# EAGLE board Transceivers_Ver2 (EAGLE 7.1.0)
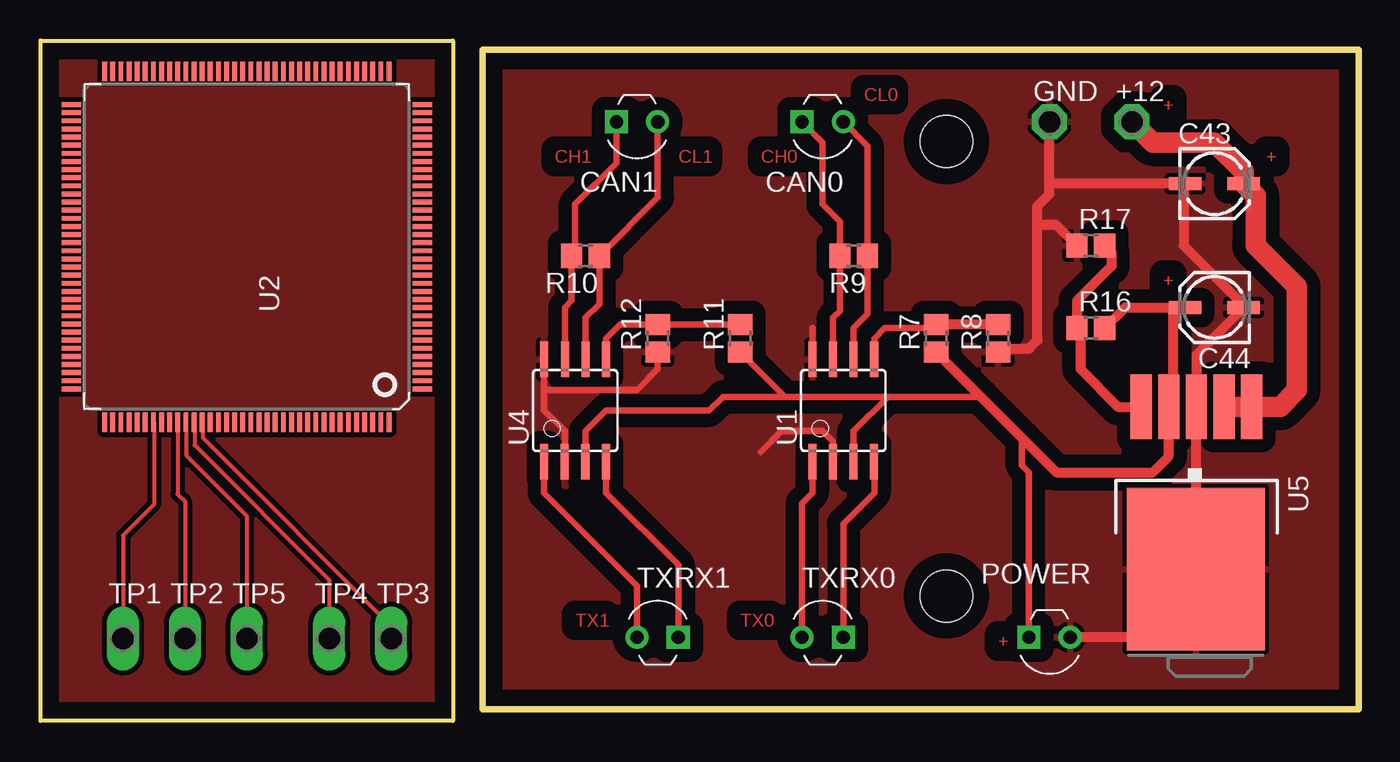
[diagram p0: board, top side]

Size 81.18 x 41.91 mm. Coordinates in mm from the lower left corner, seen from the top.
Outline: 27.2,0.71 27.2,41.35 81.18,41.35 81.18,0.71 27.2,0.71
Outline: 0,41.91 25.4,41.91 25.4,0 0,0 0,41.91
Copper layers (1*16): Top 0.035mm / dielectric 1.5mm / Bottom 0.035mm
Design rules "default": minimum track width 10mil, minimum drill 24mil, track to track 8mil, track to pad 8mil, pad to pad 8mil, via to via 8mil, smd to smd 8mil, copper to edge 40mil, drill to drill 8mil, minimum pad ring 10mil, minimum via ring 8mil, stop-mask expansion 4mil, vias tented up to drill 0mil, thermal gap 10mil
Net classes: 0 default: width 0.203 mm, drill 0.406 mm, clearance 0.203 mm; 3 usbvcc: width 0.203 mm, drill 0.406 mm, clearance 0.203 mm; 4 USBpair: width 0.254 mm, drill 0.406 mm, clearance 0.61 mm
Holes 3.2 mm at 55.78,7.7 55.78,35.7

## Footprints (pad centres in the part's own frame; a part is rotated, then mirrored left to right if it is on the bottom)
P1-13 = drill 1.321 pad 2.159 octagon: TP 0,0
153CLV-0405 = smd 2 x 0.8: + 1.8,0; - -1.8,0
2X1-100MIL = drill 0.813 pad 1.422 square: 1 2.54,-1.27 | drill 0.813 pad 1.422: 2 0,-1.27
R0805 = smd 1.3 x 1.5: 1 -0.85,0; 2 0.85,0
P1-13Y = drill 1.321 pad 1.905 long: TP 0,0
SOIC8 = smd 0.5 x 2.2: 1 -1.905,-3.154; 2 -0.645,-3.154; 3 0.625,-3.154; 4 1.895,-3.154; 5 1.905,3.154; 6 0.635,3.154; 7 -0.635,3.154; 8 -1.905,3.154
LQFP144 = smd 0.3 x 1.2: 1 -8.75,-10.8; 2 -8.25,-10.8; 3 -7.75,-10.8; 4 -7.25,-10.8; 5 -6.75,-10.8; 6 -6.25,-10.8; 7 -5.75,-10.8; 8 -5.25,-10.8; 9 -4.75,-10.8; 10 -4.25,-10.8; 11 -3.75,-10.8; 12 -3.25,-10.8; 13 -2.75,-10.8; 14 -2.25,-10.8; 15 -1.75,-10.8; 16 -1.25,-10.8; 17 -0.75,-10.8; 18 -0.25,-10.8; 19 0.25,-10.8; 20 0.75,-10.8; 21 1.25,-10.8; 22 1.75,-10.8; 23 2.25,-10.8; 24 2.75,-10.8; 25 3.25,-10.8; 26 3.75,-10.8; 27 4.25,-10.8; 28 4.75,-10.8; 29 5.25,-10.8; 30 5.75,-10.8; 31 6.25,-10.8; 32 6.75,-10.8; 33 7.25,-10.8; 34 7.75,-10.8; 35 8.25,-10.8; 36 8.75,-10.8; 73 8.75,10.8; 74 8.25,10.8; 75 7.75,10.8; 76 7.25,10.8; 77 6.75,10.8; 78 6.25,10.8; 79 5.75,10.8; 80 5.25,10.8; 81 4.75,10.8; 82 4.25,10.8; 83 3.75,10.8; 84 3.25,10.8; 85 2.75,10.8; 86 2.25,10.8; 87 1.75,10.8; 88 1.25,10.8; 89 0.75,10.8; 90 0.25,10.8; 91 -0.25,10.8; 92 -0.75,10.8; 93 -1.25,10.8; 94 -1.75,10.8; 95 -2.25,10.8; 96 -2.75,10.8; 97 -3.25,10.8; 98 -3.75,10.8; 99 -4.25,10.8; 100 -4.75,10.8; 101 -5.25,10.8; 102 -5.75,10.8; 103 -6.25,10.8; 104 -6.75,10.8; 105 -7.25,10.8; 106 -7.75,10.8; 107 -8.25,10.8; 108 -8.75,10.8 | smd 1.2 x 0.3: 37 10.8,-8.75; 38 10.8,-8.25; 39 10.8,-7.75; 40 10.8,-7.25; 41 10.8,-6.75; 42 10.8,-6.25; 43 10.8,-5.75; 44 10.8,-5.25; 45 10.8,-4.75; 46 10.8,-4.25; 47 10.8,-3.75; 48 10.8,-3.25; 49 10.8,-2.75; 50 10.8,-2.25; 51 10.8,-1.75; 52 10.8,-1.25; 53 10.8,-0.75; 54 10.8,-0.25; 55 10.8,0.25; 56 10.8,0.75; 57 10.8,1.25; 58 10.8,1.75; 59 10.8,2.25; 60 10.8,2.75; 61 10.8,3.25; 62 10.8,3.75; 63 10.8,4.25; 64 10.8,4.75; 65 10.8,5.25; 66 10.8,5.75; 67 10.8,6.25; 68 10.8,6.75; 69 10.8,7.25; 70 10.8,7.75; 71 10.8,8.25; 72 10.8,8.75; 109 -10.8,8.75; 110 -10.8,8.25; 111 -10.8,7.75; 112 -10.8,7.25; 113 -10.8,6.75; 114 -10.8,6.25; 115 -10.8,5.75; 116 -10.8,5.25; 117 -10.8,4.75; 118 -10.8,4.25; 119 -10.8,3.75; 120 -10.8,3.25; 121 -10.8,2.75; 122 -10.8,2.25; 123 -10.8,1.75; 124 -10.8,1.25; 125 -10.8,0.75; 126 -10.8,0.25; 127 -10.8,-0.25; 128 -10.8,-0.75; 129 -10.8,-1.25; 130 -10.8,-1.75; 131 -10.8,-2.25; 132 -10.8,-2.75; 133 -10.8,-3.25; 134 -10.8,-3.75; 135 -10.8,-4.25; 136 -10.8,-4.75; 137 -10.8,-5.25; 138 -10.8,-5.75; 139 -10.8,-6.25; 140 -10.8,-6.75; 141 -10.8,-7.25; 142 -10.8,-7.75; 143 -10.8,-8.25; 144 -10.8,-8.75
DPAK = smd 1.31 x 4: 1 -2.28,-4.04; 2 -0.58,-4.04; 3 1.12,-4.04; 4 2.82,-4.04; 5 4.52,-4.04 | smd 8.5 x 10: 6 1.15,5.97

## Placement (x,y rotation side)
+12  TPPAD1-13  [P1-13]  67.21,36.91 0 top
C43  10u  [153CLV-0405]  72.29,33.1 0 top
C44  10u  [153CLV-0405]  72.29,25.48 180 top
CAN0  CON-100MIL  [2X1-100MIL]  49.43,35.64 180 top
CAN1  CON-100MIL  [2X1-100MIL]  38,35.64 180 top
GND  TPPAD1-13  [P1-13]  62.13,36.91 0 top
POWER  CON-100MIL  [2X1-100MIL]  63.4,3.89 180 top
R7  [R0805]  55.14,23.57 90 top
R8  [R0805]  58.95,23.57 90 top
R9  [R0805]  50.06,28.65 180 top
R10  [R0805]  33.55,28.65 180 top
R11  [R0805]  43.08,23.57 90 top
R12  [R0805]  38,23.57 90 top
R16  3.5K  [R0805]  64.67,24.21 0 top
R17  1K  [R0805]  64.67,29.29 0 top
TP1  PTR1PAD1-13Y  [P1-13Y]  5.08,5.08 0 top
TP2  PTR1PAD1-13Y  [P1-13Y]  8.89,5.08 0 top
TP3  PTR1PAD1-13Y  [P1-13Y]  21.59,5.08 0 top
TP4  PTR1PAD1-13Y  [P1-13Y]  17.78,5.08 0 top
TP5  PTR1PAD1-13Y  [P1-13Y]  12.7,5.08 0 top
TXRX0  CON-100MIL  [2X1-100MIL]  46.89,6.43 0 top
TXRX1  CON-100MIL  [2X1-100MIL]  36.73,6.43 0 top
U1  MCP2551  [SOIC8]  49.43,19.13 0 top
U2  ATSAM3X8EA-AU  [LQFP144]  12.7,29.21 90 top
U4  MCP2551  [SOIC8]  32.92,19.13 0 top
U5  TLF1963TBATMA1  [DPAK]  72.29,15.32 180 top

## Library data of the parts
+12 GND TP1-TP5 = testpad
C43 C44 = Dash parts; EEE-FPV100UAR: 10u
CAN0 CAN1 POWER TXRX0 TXRX1 U1 U4 U5 = Dash parts
R7-R12 = resistor
R16 = SmartPrj; SMD: 3.5K, 1%
R17 = SmartPrj; SMD: 1K, 1%
U2 = SmartPrj

## Nets
+5V: C44.+ POWER.1 R7.1 R11.1 R16.2 U1.3 U4.3 U5.4
ADVREF: U2.75
CH0: CAN0.1 R9.2 U1.7
CH1: CAN1.1 R10.2 U4.7
CL0: CAN0.2 R9.1 U1.6
CL1: CAN1.2 R10.1 U4.6
GND: C43.- C44.- GND.TP POWER.2 R8.1 R12.1 R17.1 U1.2 U1.8 U4.2 U4.8 U5.3 U5.6
GND1: U2.12
GND2: U2.58
GND3: U2.106
GND4: U2.126
GNDANA: U2.74
GNDBU: U2.54
GNDPLL: U2.33
GNDUTMI: U2.44
N$1: TP1.TP U2.115
N$2: TP2.TP U2.118
N$3: R7.2 R8.2 U1.5
N$4: TP5.TP U2.119
N$5: TP4.TP U2.120
N$6: TP3.TP U2.121
N$7: R11.2 R12.2 U4.5
N$13: +12.TP C43.+ U5.1 U5.2
N$15: R16.1 R17.2 U5.5
RX0: TXRX0.1 U1.4
RX1: TXRX1.1 U4.4
TX0: TXRX0.2 U1.1
TX1: TXRX1.2 U4.1
VBUS: U2.39
VDDANA: U2.73
VDDBU: U2.52
VDDIN: U2.57
VDDIO1: U2.11
VDDIO2: U2.62
VDDIO3: U2.105
VDDIO4: U2.125

## Tracks (layer width: path | path; a pad name or v marks a point on that pad's centre or on a via)
+5V
  Top 0.406: U1.3 50.06,17.86 52.18,19.97 | 52.18,19.97 57.89,19.97 | R11.1 45.83,19.97 | 45.83,19.97 52.18,19.97 | U4.3 33.55,15.98 33.55,17.86 34.82,19.13 41.17,19.13 42.02,19.97 45.83,19.97 | POWER.1 60.86,15.32 60.43,15.74 60.43,17.43
  Top 0.61: R16.2 66.79,25.48 69.75,25.48 | 69.75,25.48 C44.+ 71.02,25.48 | R7.1 57.89,19.97 60.43,17.43 62.55,15.32 68.48,15.32 69.47,16.31 U5.4 69.75,19.64 69.75,25.48
CH0
  Top 0.406: CAN0.1 48.16,35.64 48.16,31.83 49.21,30.77 R9.2 49.21,25.26 48.79,24.84 U1.7
CH1
  Top 0.406: U4.7 32.28,25.48 32.7,25.9 R10.2 32.92,28.87 32.92,31.83 35.46,34.37 CAN1.1
CL0
  Top 0.406: CAN0.2 50.91,35.42 50.91,29.29 R9.1 50.91,25.06 50.06,24.21 U1.6
CL1
  Top 0.406: U4.6 33.55,24.84 34.4,25.69 R10.1 38,32.25 CAN1.2
GND
  Top 0.406: R8.1 59.17,22.94 | U1.2 48.79,17.22 48.16,17.86 45.62,17.86 44.35,16.59 | U1.8 47.52,24.21 | U4.2 32.28,15.98 32.28,17.86 31.01,19.13 31.01,20.4 | 31.01,20.4 U4.8 | R12.1 38,21.67 36.73,20.4 31.01,20.4
  Top 0.61: 59.17,22.94 60.86,22.94 61.39,23.46 61.39,30.56 | 61.39,30.56 61.39,31.72 62.13,32.46 62.13,33.1 | POWER.2 66.95,5.16 U5.6 71.14,19.33 U5.3 71.17,22.56 C44.- 74.09,25.58 70.38,29.29 70.38,32.99 C43.- 62.13,33.1 | R17.1 62.55,30.56 61.39,30.56 | 62.13,33.1 GND.TP
  pour Top (isolate 0.813): 26.57,41.99 81.18,41.99 81.18,0.08 26.57,0.08
N$1
  Top 0.254: U2.115 6.99,18.38 6.99,13.34 5.08,11.43 TP1.TP
N$2
  Top 0.254: U2.118 8.43,18.39 8.43,13.97 8.89,13.51 TP2.TP
N$3
  Top 0.406: R7.2 54.93,24.21 51.97,24.21 51.33,23.57 U1.5
  Top 0.61: R8.2 R7.2
N$4
  Top 0.254: U2.119 8.97,18.39 8.97,16.36 12.7,12.62 TP5.TP
N$5
  Top 0.254: U2.120 9.47,18.39 9.47,16.99 17.78,8.69 TP4.TP
N$6
  Top 0.254: U2.121 9.98,18.38 9.98,17.45 21.59,5.84 TP3.TP
N$7
  Top 0.406: R11.2 R12.2 35.67,24.42 34.82,23.57 U4.5
N$13
  Top 1.27: +12.TP 68.48,35.64 72.29,35.64 74.09,33.84 C43.+ 74.83,32.36 74.83,29.29 77.37,26.75 77.37,20.4 76.33,19.36 U5.1 U5.2
N$15
  Top 0.61: R17.2 65.94,28.87 65.94,28.02 63.82,25.9 R16.1 64.03,23.99 64.03,21.67 66.34,19.36 U5.5
RX0
  Top 0.406: U1.4 51.33,15.96 51.33,14.05 49.43,12.14 TXRX0.1
RX1
  Top 0.406: U4.4 34.82,15.96 34.82,14.05 39.27,9.6 TXRX1.1
TX0
  Top 0.406: U1.1 47.52,14.05 46.89,13.41 TXRX0.2
TX1
  Top 0.406: U4.1 31.01,14.05 36.73,8.33 TXRX1.2
VONM
  pour Top (isolate 0.305): 0,41.91 25.4,41.91 25.4,0 0,0

## Text on the board
Top: CL0 | + | CH1 | CL1 | CH0 | + | + | TX1 | TX0 | +